# Altium PCB fet_solenoid.PcbDoc
Units mm, origin at the board's own origin, x right, y up, seen from the top; angles counter-clockwise.
Board outline 152.4 x 101.6 mm, 2 copper layers (Top Layer, Bottom Layer); 32 components, 0 nets, 180 pads, 0 vias.
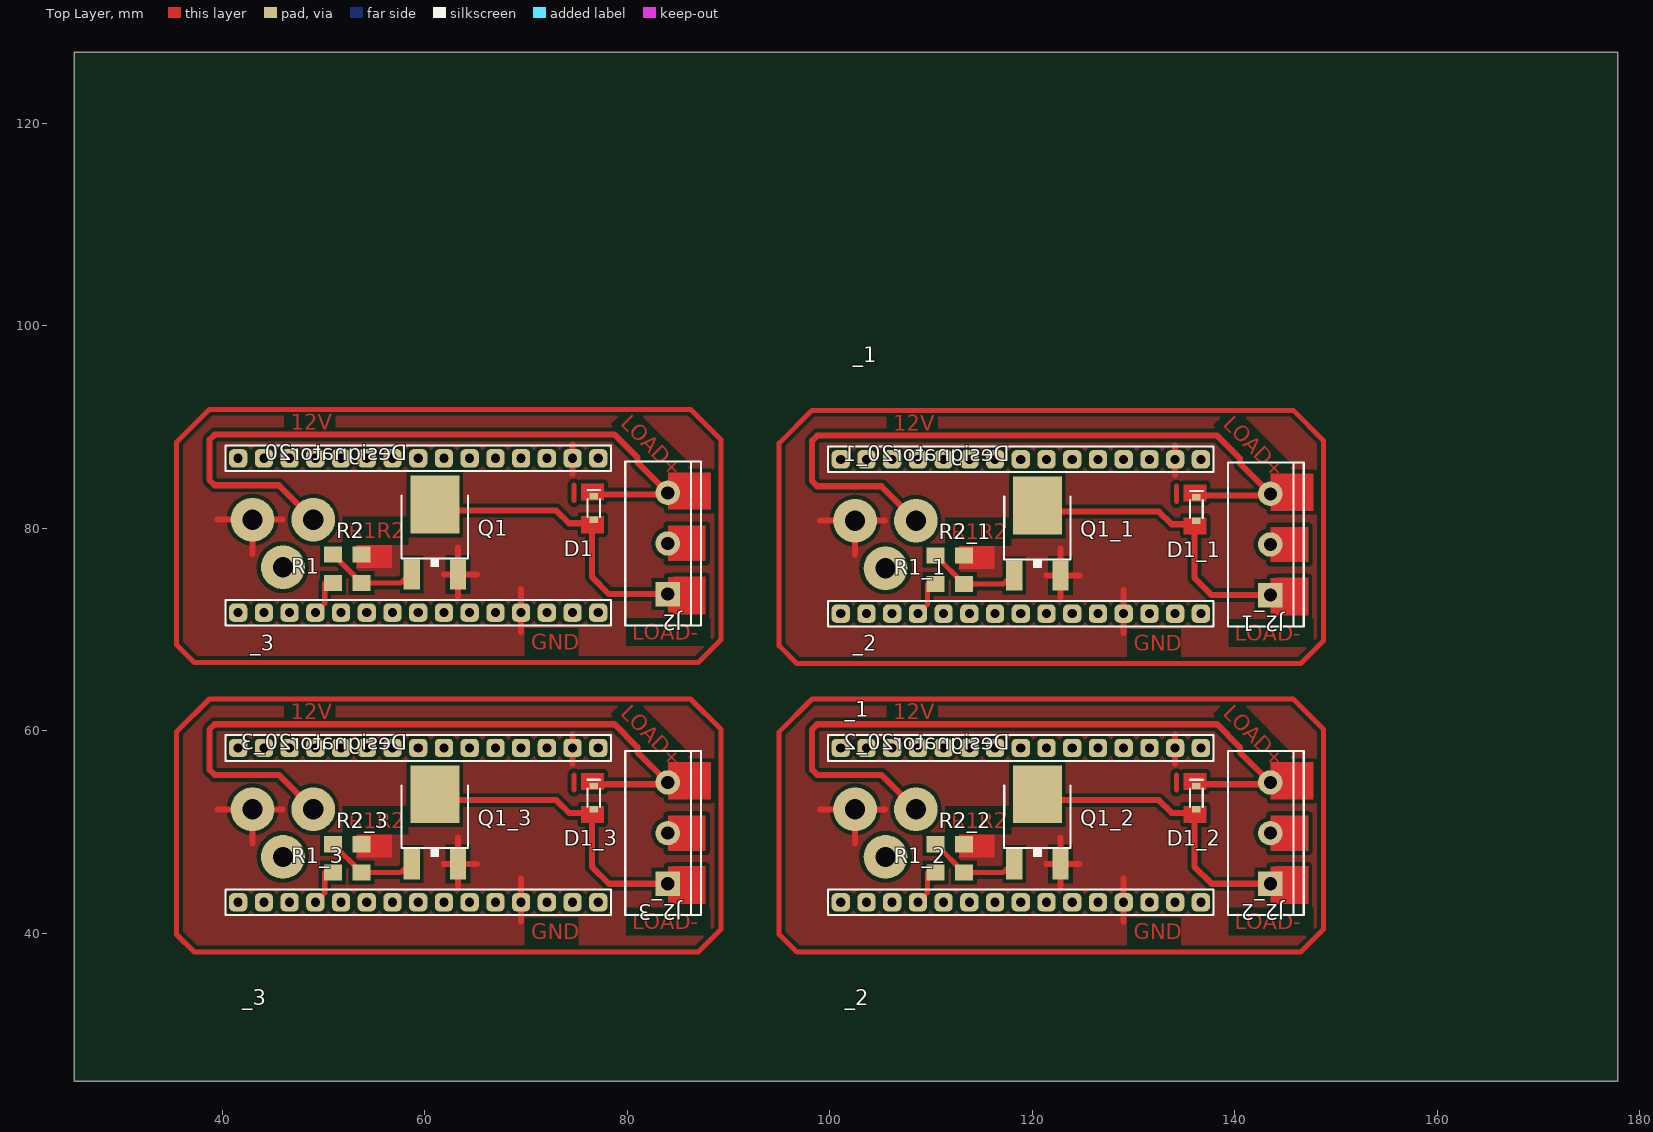
[diagram p0: Top Layer view]
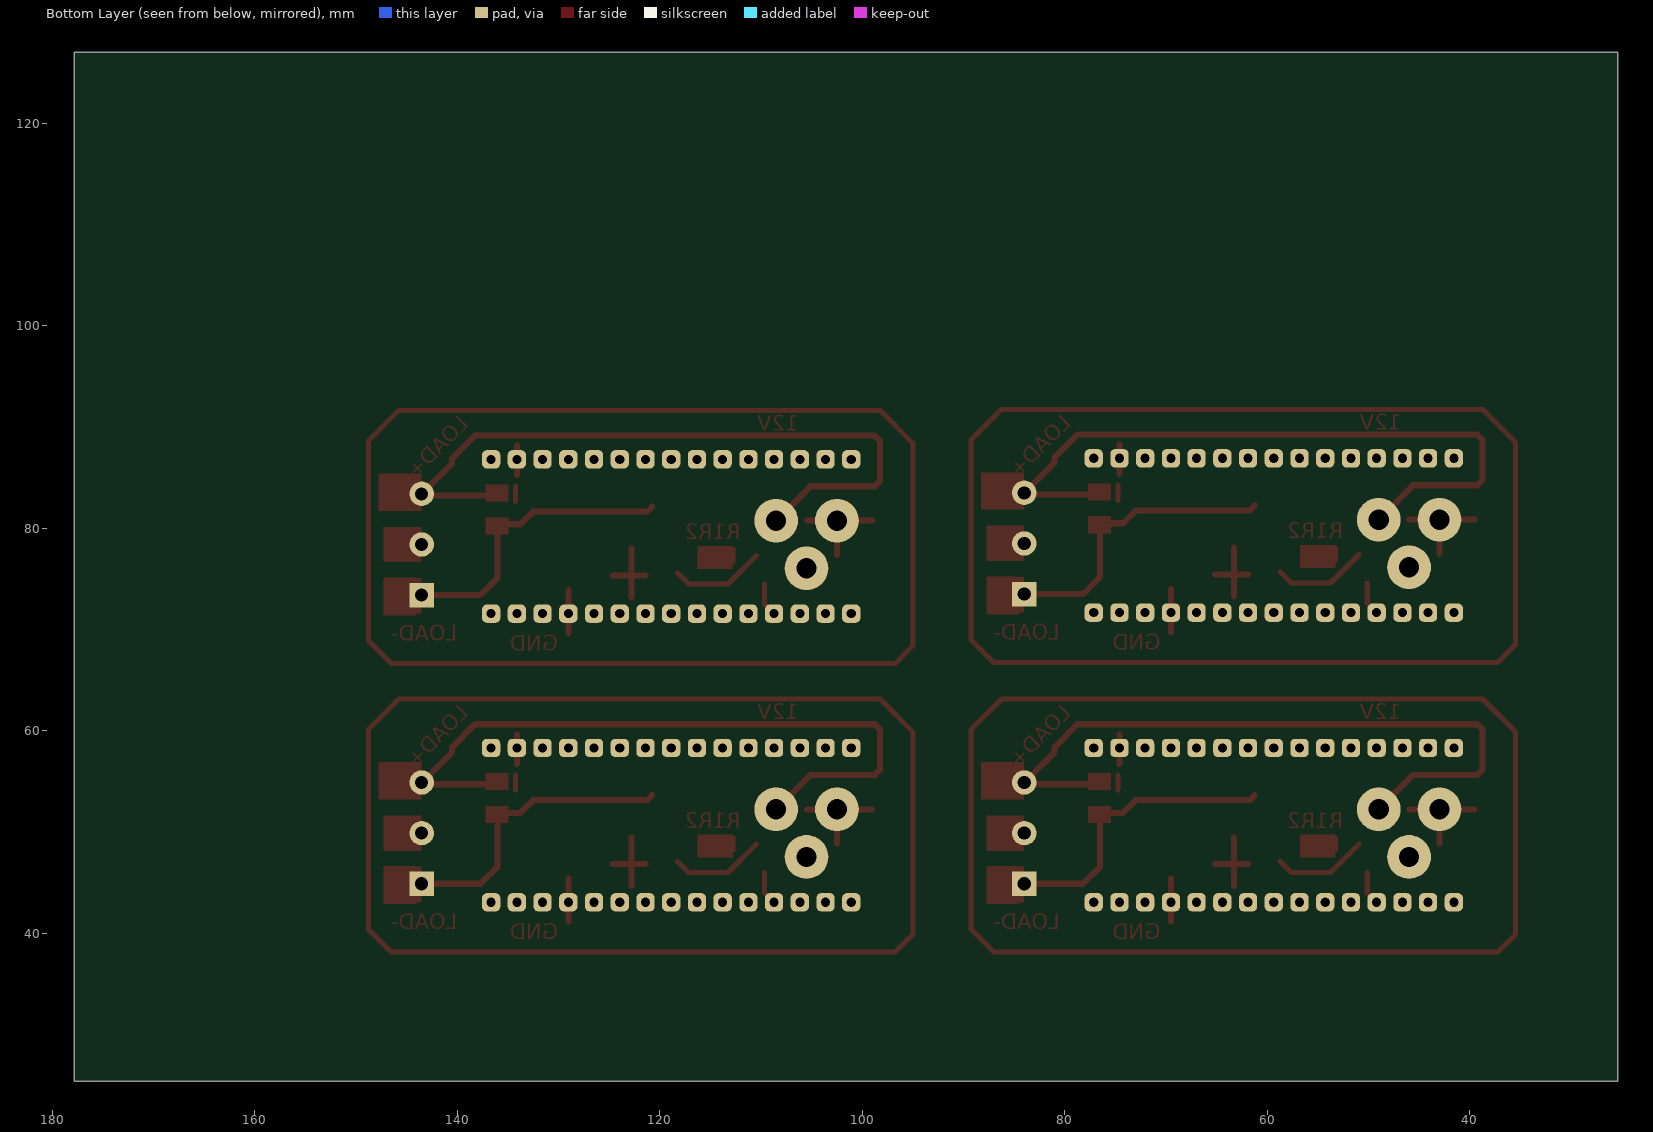
[diagram p1: Bottom Layer view, seen from below]

## Layer stack, top to bottom
Top Solder: solder mask 0.0102, Solder Resist, Dk 3.5
Top Layer: signal copper 0.0356
Dielectric 1: dielectric 0.32, FR-4, Dk 4.8
Bottom Layer: signal copper 0.0356
Bottom Solder: solder mask 0.0102, Solder Resist, Dk 3.5

## Board outline
25.4,25.4 177.8,25.4 177.8,127 25.4,127

## Design rules (kind name [scope] priority, off if disabled: settings)
Clearance Clearance_3 [InNamedPolygon('Top Layer-No Net')] p1: gap=0.4 ignorepadtopadclearanceinfootprint=FALSE
Clearance Clearance_2 [InNamedPolygon('Top Layer-No Net')] p2: gap=0.35 ignorepadtopadclearanceinfootprint=FALSE except(0: Arc-Hole Track-Hole SMDPad-Hole THPad-Hole Via-Hole Fill-Hole Poly-Hole Region-Hole Text-Hole)
Clearance .35 [InNamedPolygon('Top Layer-No Net')] p3: gap=0.254 ignorepadtopadclearanceinfootprint=FALSE except(0: Arc-Hole Track-Hole SMDPad-Hole THPad-Hole Via-Hole Fill-Hole Poly-Hole Region-Hole Text-Hole)
Clearance Clearance_1 [InNamedPolygon('Top Layer-No Net')] p4: gap=0.254 ignorepadtopadclearanceinfootprint=FALSE except(0: Arc-Hole Track-Hole SMDPad-Hole THPad-Hole Via-Hole Fill-Hole Poly-Hole Region-Hole Text-Hole; 0.35: Arc-Arc Arc-Track Arc-SMDPad Arc-THPad Arc-Via Arc-Fill Arc-Poly Arc-Region Arc-Text Track-Track Track-SMDPad Track-THPad Track-Via Track-Fill Track-Poly Track-Region Track-Text)
Clearance test [InNamedPolygon('Top Layer-No Net')] p5: gap=0.3 ignorepadtopadclearanceinfootprint=FALSE except(0: Arc-Hole Track-Hole SMDPad-Hole THPad-Hole Via-Hole Fill-Hole Poly-Hole Region-Hole Text-Hole)
Clearance [All] p6: gap=0.254 ignorepadtopadclearanceinfootprint=FALSE except(0: Arc-Hole Track-Hole SMDPad-Hole THPad-Hole Via-Hole Fill-Hole Poly-Hole Region-Hole Text-Hole)
PolygonConnect [All] p1: connectstyle=Relief reliefconductorwidth=0.254 reliefentries=4 polygonreliefangle="90 Angle" airgapwidth=0.254
RoutingVias [All] p1: holewidth=0.711 width=1.27 viastyle="Through Hole" minholewidth=0.711 minwidth=1.27 maxholewidth=0.711 maxwidth=1.27
SolderMaskExpansion [All] p1: expansion=0.102
Width [All] p1: maxlimit=0.254 minlimit=0.254 preferedwidth=0.254
30 further rules are at their usual default settings.

## Components (designator, comment, footprint, x,y, rotation, side; value= is the part's Value field where it differs from the comment)
_1 "Comment" HDR1X15 136.64,86.81 r180 top
_1 "Comment" HDR1X15 136.64,71.57 r180 top
_2 "Comment" HDR1X15 136.64,58.31 r180 top
_2 "Comment" HDR1X15 136.64,43.07 r180 top
_3 "Comment" HDR1X15 77.14,58.31 r180 top
_3 "Comment" HDR1X15 77.14,43.07 r180 top
D1 "BAT760-7" SOD-323 76.7,82 r270 top
D1_1 "BAT760-7" SOD-323 136.2,81.9 r270 top (schematic designator D1)
D1_2 "BAT760-7" SOD-323 136.2,53.4 r270 top (schematic designator D1)
D1_3 "BAT760-7" SOD-323 76.7,53.4 r270 top (schematic designator D1)
Designator20 "Comment" POWER_JACK_PTH 56.7,80.85 r270 top
Designator20_1 "Comment" POWER_JACK_PTH 116.2,80.75 r270 top
Designator20_2 "Comment" POWER_JACK_PTH 116.2,52.25 r270 top
Designator20_3 "Comment" POWER_JACK_PTH 56.7,52.25 r270 top
J2 "VS_LOW" SCREWTERMINAL-5MM-3 84,73.5 r90 top
J2_1 "VS_LOW" SCREWTERMINAL-5MM-3 143.5,73.4 r90 top (schematic designator J2)
J2_2 "VS_LOW" SCREWTERMINAL-5MM-3 143.5,44.9 r90 top (schematic designator J2)
J2_3 "VS_LOW" SCREWTERMINAL-5MM-3 84,44.9 r90 top (schematic designator J2)
Q1 "IRLR3636" DPAK 61,80.75 r0 top
Q1_1 "IRLR3636" DPAK 120.5,80.65 r0 top (schematic designator Q1)
Q1_2 "IRLR3636" DPAK 120.5,52.15 r0 top (schematic designator Q1)
Q1_3 "IRLR3636" DPAK 61,52.15 r0 top (schematic designator Q1)
R1 "150" 1206 50.95,76 r270 top
R1_1 "150" 1206 110.45,75.9 r270 top (schematic designator R1)
R1_2 "150" 1206 110.45,47.4 r270 top (schematic designator R1)
R1_3 "150" 1206 50.95,47.4 r270 top (schematic designator R1)
R2 "10K" 1206 53.75,76 r270 top
R2_1 "10K" 1206 113.25,75.9 r270 top (schematic designator R2)
R2_2 "10K" 1206 113.25,47.4 r270 top (schematic designator R2)
R2_3 "10K" 1206 53.75,47.4 r270 top (schematic designator R2)
? "Comment" HDR1X15 77.14,71.67 r180 top
? "Comment" HDR1X15 77.14,86.91 r180 top

## Footprints (in the part's own frame and the unit in brackets; to place one, negate y for a bottom-side part, rotate by r counter-clockwise, add the part's x,y. Pads: shape width x height; smd on the part's side, far side on the other; paste and mask are expansions set on the pad)
1206 [mm]
  rect 1.6x1.8 smd: 1(-1.4,0) 2(1.4,0)
DPAK [mm]
  rect 1.6x3 smd: 1(-2.28,-5.31) 3(2.28,-5.31)
  rect 4.826x5.715 smd: 4(0,1.588)
  silkscreen extent -3.28,-4.59 3.28,2.47
HDR1X15 [mm] "Connector; Header; 15 Position"
  rrect50% 1.8x1.8 hole 0.9: 1(0,0) 2(2.54,0) 3(5.08,0) 4(7.62,0) 5(10.16,0) 6(12.7,0) 7(15.24,0) 8(17.78,0) 9(20.32,0) 10(22.86,0) 11(25.4,0) 12(27.94,0) 13(30.48,0) 14(33.02,0) 15(35.56,0)
  silkscreen extent -1.27,-1.27 36.83,1.27
POWER_JACK_PTH [mm]
  round 4.318 / inner round 1.524 / far side round 4.318 hole 2: GND(0,-13.7) GNDBREAK(4.7,-10.7) PWR(0,-7.7)
SCREWTERMINAL-5MM-3 [mil]
  rect 95x95 hole 51.18: 1(0,0)
  round 95 hole 51.18: 2(196.85,0) 3(393.7,0)
  silkscreen extent -122,-130 516,165
SOD-323 [mm]
  rect 0.63x0.83 smd: A(1.15,0) C(-1.15,0)
  silkscreen extent -1.77,-0.63 0.9,0.63

## Part data
D1 D1_1 D1_2 D1_3: library part DIODE-SCHOTTKY-BAT20J
J2 J2_1 J2_2 J2_3: library part CONN_03-SCREW-5MM
Q1 Q1_1 Q1_2 Q1_3: library part MOSFET-NCH-FDD8780
R1 R1_1 R1_2 R1_3 R2 R2_1 R2_2 R2_3: library part RESISTOR1206

## Nets (pads, with @x,y where several pads share a name; then routed paths per layer and width w, separated by ;. In a path a pad name is that pad's centre, name@x,y a point inside that pad or via, vN(x,y) a via of type N, cw(c..) or ccw(c..) an arc to the next point about the centre after c; other vN are vias at no path point)
pads on no net: ?.1 ?.2 ?.3 ?.4 ?.5 ?.6 ?.7 ?.8 ?.9 ?.10 ?.11 ?.12 ?.13 ?.14 ?.15 _1.1 _1.2 _1.3 _1.4 _1.5 _1.6 _1.7 _1.8 _1.9 _1.10 _1.11 _1.12 _1.13 _1.14 _1.15 _2.1 _2.2 _2.3 _2.4 _2.5 _2.6 _2.7 _2.8 _2.9 _2.10 _2.11 _2.12 _2.13 _2.14 _2.15 _3.1 _3.2 _3.3 _3.4 _3.5 _3.6 _3.7 _3.8 _3.9 _3.10 _3.11 _3.12 _3.13 _3.14 _3.15 D1.A D1.C D1_1.A D1_1.C D1_2.A D1_2.C D1_3.A D1_3.C Designator20.GND Designator20.GNDBREAK Designator20.PWR Designator20_1.GND Designator20_1.GNDBREAK Designator20_1.PWR Designator20_2.GND Designator20_2.GNDBREAK Designator20_2.PWR Designator20_3.GND Designator20_3.GNDBREAK Designator20_3.PWR J2.1 J2.2 J2.3 J2_1.1 J2_1.2 J2_1.3 J2_2.1 J2_2.2 J2_2.3 J2_3.1 J2_3.2 J2_3.3 Q1.1 Q1.3 Q1.4 Q1_1.1 Q1_1.3 Q1_1.4 Q1_2.1 Q1_2.3 Q1_2.4 Q1_3.1 Q1_3.3 Q1_3.4 R1.1 R1.2 R1_1.1 R1_1.2 R1_2.1 R1_2.2 R1_3.1 R1_3.2 R2.1 R2.2 R2_1.1 R2_1.2 R2_2.1 R2_2.2 R2_3.1 R2_3.2
copper on no net: | length 1167.3
  Top Layer w0.254: 61.75,46.977 61.887,46.84 ; 61.75,75.577 61.887,75.44 ; 65.151,46.84 65.25,46.938 ; 65.151,75.44 65.25,75.538 ; 69.5,41.15 69.52,41.17 ; 69.5,69.75 69.52,69.77 ; 121.25,46.977 121.387,46.84 ; 121.25,75.477 121.387,75.34 ; 124.651,46.84 124.75,46.938 ; 124.651,75.34 124.75,75.438 ; 129,41.15 129.02,41.17 ; 129,69.65 129.02,69.67
  Top Layer w0.5: 49.2,43.07 50.13,44 50.13,46 ; 49.2,71.67 50.13,72.6 50.13,74.6 ; 50.95,48.8 53.75,46 57.63,46 58.72,47.09 ; 50.95,77.4 53.75,74.6 57.63,74.6 58.72,75.69 ; 53.75,48.8 53.75,48.9 ; 53.75,77.4 53.75,77.5 ; 74.75,54.15 74.75,55.65 ; 74.75,82.75 74.75,84.25 ; 108.7,43.07 109.63,44 109.63,46 ; 108.7,71.57 109.63,72.5 109.63,74.5 ; 110.45,48.8 113.25,46 117.13,46 118.22,47.09 ; 110.45,77.3 113.25,74.5 117.13,74.5 118.22,75.59 ; 113.25,48.8 113.25,48.9 ; 113.25,77.3 113.25,77.4 ; 134.25,54.15 134.25,55.65 ; 134.25,82.65 134.25,84.15 ; 35.5,39.9 37.25,38.15 87,38.15 89.25,40.4 89.25,60.15 86.25,63.15 38.75,63.15 35.5,59.9 35.5,39.9 ; 35.5,68.5 35.5,88.5 38.75,91.75 86.25,91.75 89.25,88.75 89.25,69 87,66.75 37.25,66.75 35.5,68.5 ; 95,39.9 96.75,38.15 146.5,38.15 148.75,40.4 148.75,60.15 145.75,63.15 98.25,63.15 95,59.9 95,39.9 ; 95,68.4 96.75,66.65 146.5,66.65 148.75,68.9 148.75,88.65 145.75,91.65 98.25,91.65 95,88.4 95,68.4
  Top Layer w0.6: 39.547,52.25 45.953,52.25 ; 39.547,80.85 45.953,80.85 ; 43,48.887 43,52.25 ; 43,77.487 43,80.85 ; 49,52.25 45.6,55.65 39.25,55.65 38.75,56.15 38.75,60.15 39.25,60.65 78.75,60.65 81,58.4 81,57.9 84,54.9 ; 49,80.85 45.6,84.25 39.25,84.25 38.75,84.75 38.75,88.75 39.25,89.25 78.75,89.25 81,87 81,86.5 84,83.5 ; 61.25,53.65 61.75,53.15 73,53.15 74.25,51.9 76.5,51.9 ; 61.25,82.25 61.75,81.75 73,81.75 74.25,80.5 76.5,80.5 ; 61.887,46.84 63.28,46.84 ; 61.887,75.44 63.28,75.44 ; 63.28,44.68 63.28,46.84 ; 63.28,49.481 63.28,46.84 ; 63.28,73.28 63.28,75.44 ; 63.28,78.081 63.28,75.44 ; 65.151,46.84 63.28,46.84 ; 65.151,75.44 63.28,75.44 ; 69.52,41.17 69.52,43.07 69.52,45.412 ; 69.52,69.77 69.52,71.67 69.52,74.012 ; 74.6,56.75 74.6,58.31 74.6,59.65 ; 74.6,85.35 74.6,86.91 74.6,88.25 ; 76.5,51.65 76.5,46.6 78.2,44.9 84,44.9 ; 76.5,80.25 76.5,75.2 78.2,73.5 84,73.5 ; 76.7,54.723 84.177,54.723 ; 76.7,83.323 84.177,83.323 ; 99.047,52.25 105.453,52.25 ; 99.047,80.75 105.453,80.75 ; 102.5,48.887 102.5,52.25 ; 102.5,77.387 102.5,80.75 ; 108.5,52.25 105.1,55.65 98.75,55.65 98.25,56.15 98.25,60.15 98.75,60.65 138.25,60.65 140.5,58.4 140.5,57.9 143.5,54.9 ; 108.5,80.75 105.1,84.15 98.75,84.15 98.25,84.65 98.25,88.65 98.75,89.15 138.25,89.15 140.5,86.9 140.5,86.4 143.5,83.4 ; 120.75,53.65 121.25,53.15 132.5,53.15 133.75,51.9 136,51.9 ; 120.75,82.15 121.25,81.65 132.5,81.65 133.75,80.4 136,80.4 ; 121.387,46.84 122.78,46.84 ; 121.387,75.34 122.78,75.34 ; 122.78,44.68 122.78,46.84 ; 122.78,49.481 122.78,46.84 ; 122.78,73.18 122.78,75.34 ; 122.78,77.981 122.78,75.34 ; 124.651,46.84 122.78,46.84 ; 124.651,75.34 122.78,75.34 ; 129.02,41.17 129.02,43.07 129.02,45.412 ; 129.02,69.67 129.02,71.57 129.02,73.912 ; 134.1,56.75 134.1,58.31 134.1,59.65 ; 134.1,85.25 134.1,86.81 134.1,88.15 ; 136,51.65 136,46.6 137.7,44.9 143.5,44.9 ; 136,80.15 136,75.1 137.7,73.4 143.5,73.4 ; 136.2,54.723 143.677,54.723 ; 136.2,83.223 143.677,83.223

## Polygon pours and split planes (outlines as drawn)
no net on Top Layer "Top Layer-No Net" (solid, pour order 18): 38.75,63.15 86.25,63.15 89.25,60.15 89.25,40.4 87,38.15 37.25,38.15 35.5,39.9 35.5,59.9
no net on Top Layer "Top Layer-No Net" (solid, pour order 16): 98.25,63.15 145.75,63.15 148.75,60.15 148.75,40.4 146.5,38.15 96.75,38.15 95,39.9 95,59.9
no net on Top Layer "Top Layer-No Net" (solid, pour order 14): 98.25,91.65 145.75,91.65 148.75,88.65 148.75,68.9 146.5,66.65 96.75,66.65 95,68.4 95,88.4
no net on Top Layer "Top Layer-No Net" (solid, pour order 6): 38.75,91.75 86.25,91.75 89.25,88.75 89.25,69 87,66.75 37.25,66.75 35.5,68.5 35.5,88.5

## Other copper
Top Layer:
  region: 75.45,55.839 75.45,54.15 77.7,54.15 77.7,55.839
  region: 75.45,52.589 75.45,50.9 77.7,50.9 77.7,52.589
  rectangle: 84,53.23 85.5,56.9
  rectangle: 84,48.15 85.5,51.65
  rectangle: 84,43.07 85.5,46.6
  region: 87.75,46.65 84.5,46.65 84.5,42.9 87.75,42.9
  region: 87.75,51.65 84.5,51.65 84.5,48.15 87.75,48.15
  region: 88.25,56.9 84.5,56.9 84.5,53.23 88.25,53.23
  rectangle: 53,48.028 56,49.595
  rectangle: 53.243,47.483 56.75,49.746
  region: 134.95,55.839 134.95,54.15 137.2,54.15 137.2,55.839
  region: 134.95,52.589 134.95,50.9 137.2,50.9 137.2,52.589
  rectangle: 143.5,53.23 145,56.9
  rectangle: 143.5,48.15 145,51.65
  rectangle: 143.5,43.07 145,46.6
  region: 147.25,46.65 144,46.65 144,42.9 147.25,42.9
  region: 147.25,51.65 144,51.65 144,48.15 147.25,48.15
  region: 147.75,56.9 144,56.9 144,53.23 147.75,53.23
  rectangle: 112.5,48.028 115.5,49.595
  rectangle: 112.743,47.483 116.25,49.746
  region: 134.95,84.339 134.95,82.65 137.2,82.65 137.2,84.339
  region: 134.95,81.089 134.95,79.4 137.2,79.4 137.2,81.089
  rectangle: 143.5,81.73 145,85.4
  rectangle: 143.5,76.65 145,80.15
  rectangle: 143.5,71.57 145,75.1
  region: 147.25,75.15 144,75.15 144,71.4 147.25,71.4
  region: 147.25,80.15 144,80.15 144,76.65 147.25,76.65
  region: 147.75,85.4 144,85.4 144,81.73 147.75,81.73
  rectangle: 112.5,76.528 115.5,78.095
  rectangle: 112.743,75.983 116.25,78.246
  rectangle: 53.243,76.083 56.75,78.346
  rectangle: 53,76.628 56,78.195
  region: 88.25,85.5 84.5,85.5 84.5,81.83 88.25,81.83
  region: 87.75,80.25 84.5,80.25 84.5,76.75 87.75,76.75
  region: 87.75,75.25 84.5,75.25 84.5,71.5 87.75,71.5
  rectangle: 84,71.67 85.5,75.2
  rectangle: 84,76.75 85.5,80.25
  rectangle: 84,81.83 85.5,85.5
  region: 75.45,81.189 75.45,79.5 77.7,79.5 77.7,81.189
  region: 75.45,84.439 75.45,82.75 77.7,82.75 77.7,84.439
  text "LOAD+" at 79.25,90.25 h1.52 r315
  text "LOAD+" at 138.75,90.15 h1.52 r315
  text "12V" at 46.75,89.75 h1.52
  text "12V" at 106.25,89.65 h1.52
  text "R1" at 52.5,79 h1.52
  text "R2" at 55.25,79 h1.52
  text "R1" at 112,78.9 h1.52
  text "R2" at 114.75,78.9 h1.52
  text "LOAD-" at 80.5,69 h1.52
  text "LOAD-" at 140,68.9 h1.52
  text "GND" at 70.5,68 h1.52
  text "GND" at 130,67.9 h1.52
  text "LOAD+" at 79.25,61.65 h1.52 r315
  text "LOAD+" at 138.75,61.65 h1.52 r315
  text "12V" at 46.75,61.15 h1.52
  text "12V" at 106.25,61.15 h1.52
  text "R1" at 52.5,50.4 h1.52
  text "R2" at 55.25,50.4 h1.52
  text "R1" at 112,50.4 h1.52
  text "R2" at 114.75,50.4 h1.52
  text "LOAD-" at 80.5,40.4 h1.52
  text "LOAD-" at 140,40.4 h1.52
  text "GND" at 70.5,39.4 h1.52
  text "GND" at 130,39.4 h1.52